# Altium PCB EV306V1.1.PcbDoc (part 1 of 2)
Units mil, origin at the board's own origin, x right, y up, seen from the top; angles counter-clockwise.
Board outline 2423.31 x 1575 mil, 2 copper layers (Top Layer, Bottom Layer); 70 components, 60 nets, 272 pads, 204 vias.
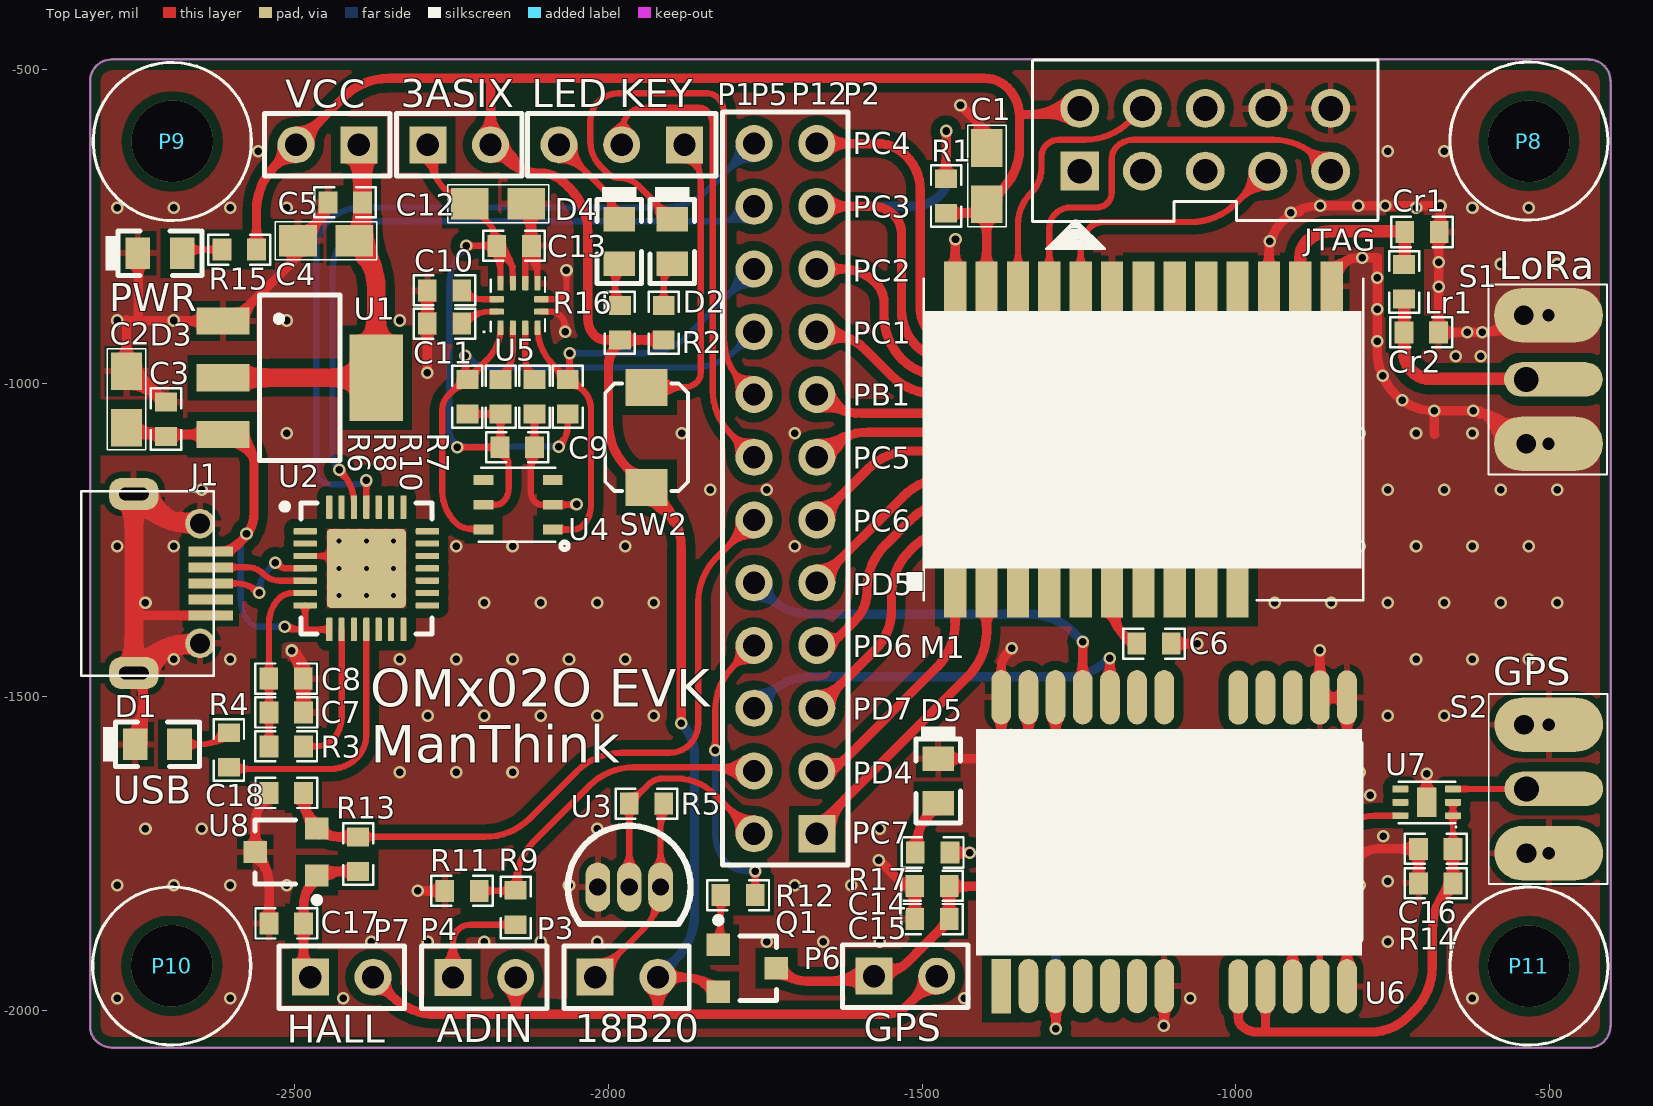
[diagram p0: Top Layer view]
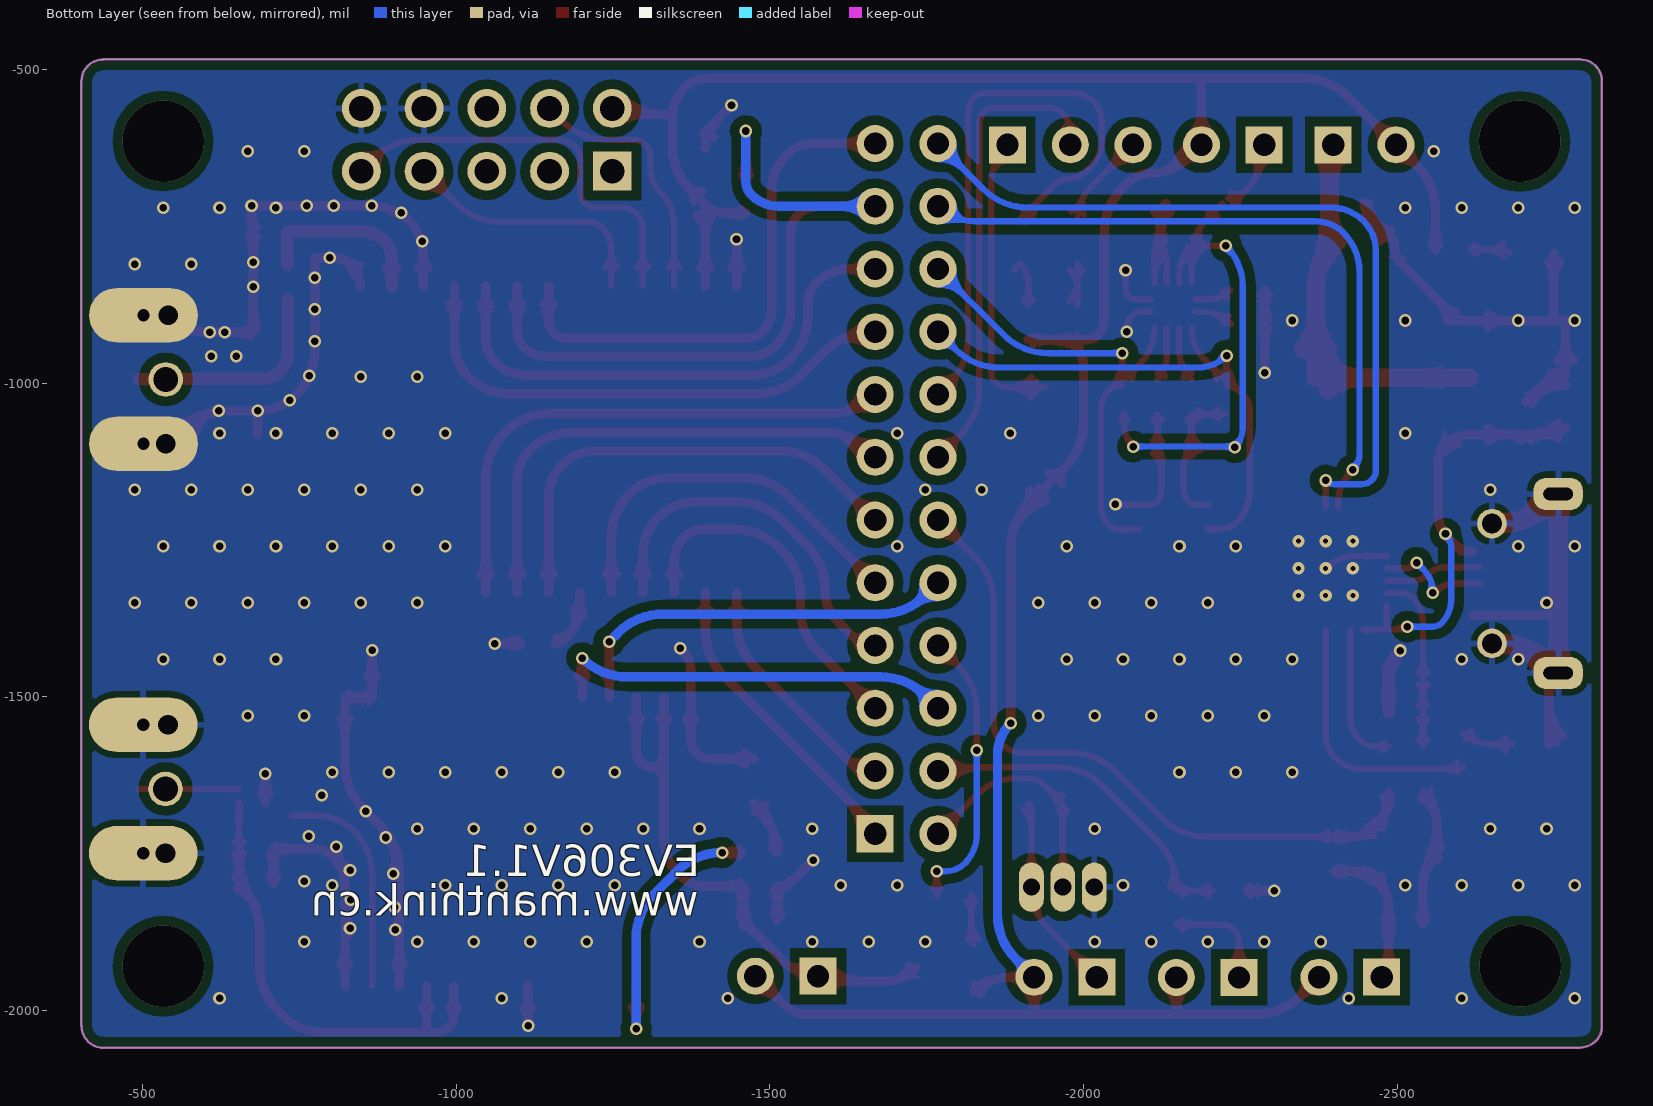
[diagram p1: Bottom Layer view, seen from below]

## Layer stack, top to bottom
Top Layer: signal copper 1.4
Dielectric: dielectric 12.6, FR-4, Dk 4.8
Bottom Layer: signal copper 1.4

## Board outline
-2826.31,-554 -2826.31,-518.46 cw(c-2792.13,-518.46) -2816.3,-494.3 -2815,-493 cw(c-2793.27,-514.73) -2793.27,-484 -2789.48,-484 -437.14,-484 cw(c-437.14,-518.14) -413,-494 cw(c-437.14,-518.14) -403,-518.14 -403,-535 -403,-2023.44 cw(c-440.56,-2023.44) -414,-2050 cw(c-435.73,-2028.27) -435.73,-2059 -440,-2059 -2789.03,-2059 cw(c-2789.03,-2018.03) -2818,-2047 cw(c-2797.94,-2026.94) -2826.31,-2026.94 -2826.31,-2022 -2826.31,-554

## Design rules (kind name [scope] priority, off if disabled: settings)
Clearance "Stitching GND" [IsStitchingVia and InNet('GND') vs (IsVia and (Not IsStitchingVia)) Or IsPad] p1: gap=15
Clearance [All] p2 off: gap=8
Clearance Clearance_1 [All] p3: gap=8
Clearance LNA_Net [All] p4 off: gap=15
ComponentClearance [All] p1 off: gap=10 collisioncheckmode=3 verticalgap=10 showdistances=FALSE
FabricationTestpoint [(IsPad And (OnTopLayer Or OnBottomLayer))] p1: side=3 testpointundercomponent=TRUE minsize=40 maxsize=100 preferedsize=60 minholesize=0 maxholesize=40 preferedholesize=32 testpointgrid=1 allowsidetop=TRUE allowsidebottom=TRUE usegrid=TRUE gridtolerance=0.01
HoleSize [All] p1: absolutevalues=TRUE maxlimit=393.7 minlimit=0 maxpercent=80.000 minpercent=20.000
HoleToHoleClearance [All] p1: gap=8 allowstackedmicrovias=TRUE
MinimumSolderMaskSliver MinimumSolderMaskSliver_TSSOP [(InComponent('U4') OR InComponent('U1') OR InComponent('U3')OR InComponent('U5')) vs (InComponent('U4') OR InComponent('U1') OR InComponent('U3')OR InComponent('U5'))] p1: minsoldermaskwidth=0
MinimumSolderMaskSliver MinimumSolderMaskSliver_OSC [InComponent('Xr1') vs InComponent('Xr1')] p2: minsoldermaskwidth=6
MinimumSolderMaskSliver MinimumSolderMaskSliver_QFN [InComponent('U2') vs InComponent('U2')] p3: minsoldermaskwidth=0
MinimumSolderMaskSliver [All] p4: minsoldermaskwidth=1
PlaneClearance PlaneClearance_RFRC [(InNet('GND') AND InComponentClass('RF'))] p1: clearance=13.78
PlaneClearance PlaneClearance_QFN [(InComponent('U2') AND InNet('GND'))] p2 off: clearance=13.78
PlaneClearance [All] p3: clearance=13.78
PlaneConnect PlaneConnect_RFRC [(InNet('GND') AND InComponentClass('RF') )] p1: planeconnectstyle=Direct reliefexpansion=20 reliefentries=4 reliefconductorwidth=10 reliefairgap=10
PlaneConnect PlaneConnect_RFQFN [(InNet('GND') AND InComponent('U2'))] p2 off: planeconnectstyle=Direct reliefexpansion=20 reliefentries=4 reliefconductorwidth=10 reliefairgap=10
PlaneConnect [All] p3: planeconnectstyle=Relief reliefexpansion=20 reliefentries=4 reliefconductorwidth=10 reliefairgap=15
PolygonConnect PolygonConnect_CON [(InComponent('P1') OR InComponent('P2') OR InComponent('P3') OR InComponent('P4') OR InComponent('P5')) vs InNet('GND')] p1: connectstyle=Relief reliefconductorwidth=30 reliefentries=4 polygonreliefangle="90 Angle" airgapwidth=10
PolygonConnect PolygonConnect_VIA [IsVia vs InNet('GND')] p2: connectstyle=Direct reliefconductorwidth=10 reliefentries=4 polygonreliefangle="90 Angle" airgapwidth=10
PolygonConnect PolygonConnect_RFRC [InNet('GND') vs InComponentClass('RF')] p3: connectstyle=Relief reliefconductorwidth=15 reliefentries=4 polygonreliefangle="90 Angle" airgapwidth=10
PolygonConnect PolygonConnect_RFIC [InNet('GND') vs ((InComponent('S1') OR InComponent('U2')))] p4: connectstyle=Direct reliefconductorwidth=10 reliefentries=4 polygonreliefangle="90 Angle" airgapwidth=10
PolygonConnect [All] p5: connectstyle=Relief reliefconductorwidth=10 reliefentries=4 polygonreliefangle="90 Angle" airgapwidth=10
RoutingCorners [All] p1: cornerstyle=Round minsetback=100 maxsetback=100
RoutingVias [All] p1: holewidth=12 width=20 viastyle="Through Hole" minholewidth=0 minwidth=0 maxholewidth=40 maxwidth=60
SilkToSilkClearance [All] p1 off: silktosilkclearance=8
SilkToSolderMaskClearance [IsPad] p1 off: minsilkscreentomaskgap=8 clearancetoexposedcopper=TRUE
SolderMaskExpansion [All] p1: expansion=4
Width [All] p1: maxlimit=40 minlimit=3.94 preferedwidth=10
18 further rules are at their usual default settings.

## Classes and differential pairs
component class Module&Connector: C1 C2 C3 C4 C5 C6 C7 C8 Cr1 Cr2 D1 D2 D3 D4 J1 JTAG Lr1 M1 P1 P2 P8 P9 P10 P11 P12 R1 R2 R3 R4 R15 R16 S1 SW2 U1 U2
component class Sensor: C9 C10 C11 C12 C13 C14 C15 C16 C17 C18 D5 P3 P4 P5 P6 P7 Q1 R5 R6 R7 R8 R9 R10 R11 R12 R13 R14 R17 S2 U3 U4 U5 U6 U7 U8

## Components (designator, comment, footprint, x,y, rotation, side; value= is the part's Value field where it differs from the comment)
C1 "10uF" 0805 -1397,-715 r0 top
C2 "10uF" 0805 -2768.31,-1070.69 r0 top
C3 "0.1uF" 0603RF -2705.31,-1083.69 r90 top
C4 "10uF" 0805 -2405,-773 r90 top
C5 "0.1uF" 0603RF -2393.31,-711.69 r180 top
C6 "0.1uF" 0603RF -1104,-1415 r180 top
C7 "4.7uF" 0603RF -2540.31,-1524.69 r0 top
C8 "0.1uF" 0603RF -2540.43,-1470.69 r0 top
C9 "100pF" 0603RF -2119,-1102 r180 top
C10 "0.1uF" 0603RF -2235,-852 r180 top
C11 "0.1uF" 0603RF -2288,-905 r0 top
C12 "10uF" 0805 -2221,-714 r270 top
C13 "0.1uF" 0603RF -2124,-781 r180 top
C14 "0.1uF" 0603RF -1511,-1801 r0 top
C15 "2.2uF" 0603RF -1458,-1854 r180 top
C16 "100pF" 0603RF -708,-1742 r0 top
C17 "10nF" 0603RF -2540,-1861 r0 top
C18 "100pF" 0603RF -2540,-1653 r0 top
Cr1 "NC" 0603RF -677,-759 r180 top
Cr2 "NC" 0603RF -678,-919 r180 top
D1 "RED" LED0603 -2680,-1580 r0 top
D2 "Blue" LED0603 -1903,-813 r270 top
D3 "RED" LED0603 -2676,-797 r0 top
D4 "RED" LED0603 -1987,-813 r270 top
D5 "Blue" LED0603 -1479,-1673 r270 top
J1 "micro usb" MICROUSB-D -2634,-1268 r180 top
JTAG "IDC-10" JTAG10-MINI -1049,-662 r0 top
Lr1 "0" 0603RF -732,-812 r270 top
M1 "OMx02" OMx02 -1448,-1343 r0 top
P1 "Header 2" HDR1X2 -2398,-620 r180 top
P2 "Header 12X2" Header2X12 -1676,-920 r0 top
P3 "Header 2" HDR1X2 -2021.31,-1946.69 r0 top
P4 "Header 2" HDR1X2 -2248,-1947 r0 top
P5 "Header 2" HDR1X2 -2288,-620 r0 top
P6 "Header 2" HDR1X2 -1577,-1945 r0 top
P7 "Header 2" HDR1X2 -2475.31,-1946.69 r0 top
P8 "Header1" FIX_HOLE -533,-614 r0 top locked
P9 "Header1" FIX_HOLE -2695.31,-614.69 r0 top locked
P10 "Header1" FIX_HOLE -2696.31,-1928.69 r0 top locked
P11 "Header1" FIX_HOLE -533,-1929 r0 top locked
P12 "Header 3" HDR1X3 -1879,-620 r180 top
Q1 "8550" SO-G3/Z3.3 -1779,-1933 r270 top
R1 "47KR" 0603RF -1462,-675 r270 top
R2 "1kR" 0603RF -1912,-877 r270 top
R3 "4.7K" 0603RF -2487.31,-1578.69 r180 top
R4 "4.7K" 0603RF -2605,-1611 r90 top
R5 "510R" 0603RF -1913,-1670 r180 top
R6 "47KR" 0603RF -2225,-995 r270 top
R7 "47KR" 0603RF -2065,-995 r270 top
R8 "47KR" 0603RF -2172,-995 r270 top
R9 "10kR" 0603RF -2148,-1862 r90 top
R10 "0R" 0603RF -2118,-995 r270 top
R11 "10kR" 0603RF -2207,-1809 r180 top
R12 "1kR" 0603RF -1820,-1816 r0 top
R13 "100KR" 0603RF -2399,-1777 r90 top
R14 "4.7K" 0603RF -655,-1797 r180 top
R15 "1kR" 0603RF -2615,-787 r0 top
R16 "1kR" 0603RF -1982,-877 r270 top
R17 "1kR" 0603RF -1510,-1748 r0 top
S1 "SMA" SMA -530.42,-990.38 r0 top
S2 "SMA" SMA -530,-1643 r0 top
SW2 "SW2_STM151XX" SW24*3 -1938,-1009 r270 top
U1 "LM1117-3.3" SOT-223 -2614.31,-900.69 r180 top
U2 "CP2102" QFN28_CP2102 -2386,-1295 r0 top
U3 "DS18B20" LC-TO-92(TO-92-3) -2017,-1803 r0 top
U4 "SHT20" QFN6 -2085,-1231 r180 top
U5 "LIS2DH12" LIS2DH12 -2145,-876 r90 top
U6 "NEO_6M" NEO-5 -823,-1491 r270 top
U7 "SKY65715_81" SKY65715 -699.39,-1668.51 r180 top
U8 "YS4915" SOT-23 -2514,-1747 r90 top

## Footprints (in the part's own frame and the unit in brackets; to place one, negate y for a bottom-side part, rotate by r counter-clockwise, add the part's x,y. Pads: shape width x height; smd on the part's side, far side on the other; paste and mask are expansions set on the pad)
0603RF [mil]
  rect 30x35 smd: 1(-1,0) 2(54,0)
  silkscreen extent -23,-24 76,24
0805 [mil]
  rect 50x60 smd: 1(0,0) 2(0,90)
  silkscreen extent -31,-35 31,126
FIX_HOLE [mil]
  silkscreen extent -126,-126 126,126
HDR1X2 [mm] "Connector; Header; 2 Position"
  rect 1.5x1.5 hole 0.9: 1(0,0)
  round 1.5 hole 0.9: 2(2.54,0)
  silkscreen extent -1.27,-1.27 3.81,1.27
HDR1X3 [mm] "Connector; Header; 3 Position"
  rect 1.5x1.5 hole 0.9: 1(0,0)
  round 1.5 hole 0.9: 2(2.54,0) 3(5.08,0)
  silkscreen extent -1.27,-1.27 6.35,1.27
Header2X12 [mm]
  rect 1.5x1.5 hole 0.9: 1(0.203,-20.269)
  round 1.5 hole 0.9: 2(-2.337,-20.269) 3(0.203,-17.729) 4(-2.337,-17.729) 5(0.203,-15.189) 6(-2.337,-15.189) 7(0.203,-12.649) 8(-2.337,-12.649) 9(0.203,-10.109) 10(-2.337,-10.109) 11(0.203,-7.569) 12(-2.337,-7.569) 13(0.203,-5.029) 14(-2.337,-5.029) 15(0.203,-2.489) 16(-2.337,-2.489) 17(0.203,0.051) 18(-2.337,0.051) 19(0.203,2.591) 20(-2.337,2.591) 21(0.203,5.131) 22(-2.337,5.131) 23(0.203,7.671) 24(-2.337,7.671)
  silkscreen extent -3.61,-21.54 1.47,8.94
JTAG10-MINI [mil]
  rect 62x62 hole 39.37: 1(-200,0)
  round 62 hole 39.37: 2(-200,100) 3(-100,0) 4(-100,100) 5(0,0) 6(0,100) 7(100,0) 8(100,100) 9(200,0) 10(200,100)
  silkscreen extent -276,-124 276,177
LC-TO-92(TO-92-3) [mm]
  oval 1x2 hole 0.7 mask+0.051: 1(0,0) 2(1.27,0) 3(2.54,0)
  silkscreen extent -1.21,-1.5 3.75,2.48, body extent -1.34,-1.6 3.88,2.6, height 8
LED0603 [mm]
  rect 1x1.27 smd: 1(-0.092,0.111) 2(-1.892,0.111)
  silkscreen extent -3.19,-0.79 0.71,1.01
LIS2DH12 [mm]
  rrect10% 0.575x0.25 smd: 1(-0.9,0.689) 10(0.9,0.689)
  rrect25% 0.575x0.25 smd: 2(-0.9,0.189) 3(-0.9,-0.311) 4(-0.9,-0.811) 7(0.9,-0.811) 8(0.9,-0.311) 9(0.9,0.189)
  rrect25% 0.25x0.575 smd: 5(-0.25,-0.961) 6(0.25,-0.961) 11(0.25,0.839) 12(-0.25,0.839)
  silkscreen extent -1.05,-1.11 1.15,1.09
MICROUSB-D [mm]
  rect 1.8x0.4 smd: 1(0,0) 2(0,0.65) 3(0,1.3) 4(0,1.95) 5(0,2.6)
  round 1.2 hole 0.8: 6(0.432,-1.125) 7(0.432,3.725)
  rrect77% 2x1.3 hole 0.5 slot 1.2 at 0 deg: 8(3.112,-2.325) 9(3.112,4.925)
  silkscreen extent -0.12,-2.43 5.23,5.03
NEO-5 [mil]
  rect 86.61x31.5 smd: 1(469.9,-551.1)
  oval 86.61x31.5 smd: 2(469.9,-507.8) 3(469.9,-464.5) 4(469.9,-421.2) 5(469.9,-377.9) 6(469.9,-334.6) 7(469.9,-291.3) 8(470.3,-173.2) 9(470.3,-129.9) 10(470.3,-86.6) 11(470.3,-43.3) 12(470,0) 13(10,0) 14(10,-43.3) 15(10,-86.6) 16(10,-129.9) 17(10,-173.2) 18(9.6,-291.3) 19(9.6,-334.6) 20(9.6,-377.9) 21(9.6,-421.2) 22(9.6,-464.5) 23(9.6,-507.8) 24(9.6,-551.1)
  silkscreen extent 84,-586 395,22
OMx02 [mm]
  rect 0.9x2 smd: 1(0.014,0.234) 2(1.284,0.234) 3(2.554,0.234) 4(3.824,0.234) 5(5.094,0.234) 6(6.364,0.234) 7(7.634,0.234) 8(8.904,0.234) 9(10.174,0.234) 10(11.444,0.234) 11(15.254,12.634) 12(13.984,12.634) 13(12.714,12.634) 14(11.444,12.634) 15(10.174,12.634) 16(8.904,12.634) 17(7.634,12.634) 18(6.364,12.634) 19(5.094,12.634) 20(3.824,12.634) 21(2.554,12.634) 22(1.284,12.634) 23(0.014,12.634)
  silkscreen extent -1.26,-0.07 16.52,12.93
QFN6 [mm]
  rect 0.8x0.4 smd: 1(0.102,0.051) 2(0.102,-0.949) 3(0.102,-1.949) 4(2.902,-1.949) 5(2.902,-0.949) 6(2.902,0.051)
  silkscreen extent -0.53,-2.45 3.1,0.86
QFN28_CP2102 [mm] "QFN, 28-Leads, Body 5.00x5.00mm, Pitch 0.50mm, Thermal Pad 3.13x3.13mm, IPC Low Density"
  rrect10% 3.2x3.2 smd: 0(0,0)
  rrect25% 0.95x0.25 smd: 1(-2.475,1.5) 2(-2.475,1) 3(-2.475,0.5) 4(-2.475,0) 5(-2.475,-0.5) 6(-2.475,-1) 7(-2.475,-1.5) 15(2.475,-1.5) 16(2.475,-1) 17(2.475,-0.5) 18(2.475,0) 19(2.475,0.5) 20(2.475,1) 21(2.475,1.5)
  rrect25% 0.25x0.95 smd: 8(-1.5,-2.475) 9(-1,-2.475) 10(-0.5,-2.475) 11(0,-2.475) 12(0.5,-2.475) 13(1,-2.475) 14(1.5,-2.475) 22(1.5,2.475) 23(1,2.475) 24(0.5,2.475) 25(0,2.475) 26(-0.5,2.475) 27(-1,2.475) 28(-1.5,2.475)
  silkscreen extent -3.42,-2.65 2.65,2.65, body extent -2.5,-2.5 2.5,2.5, height 0.8
SKY65715 [mm]
  rrect10% 0.8x1.2 smd: 0(-0.086,-0.013)
  rrect10% 0.65x0.275 smd: 1(-1.151,0.527)
  rrect25% 0.65x0.275 smd: 2(-1.151,-0.013) 3(-1.151,-0.553) 4(0.979,-0.553) 5(0.979,-0.013) 6(0.979,0.527)
  silkscreen extent -1.25,-0.84 1.05,0.83
SMA [mm]
  round 1.4 hole 1: 1(-0.175,-0.092)
  oval 4x1.397 smd: 1(0.925,-0.092)
  round 1.4 hole 0.8: 2(-0.275,2.508) 2(-0.175,-2.692)
  oval 4.4x2.2 hole 0.5: 2(0.725,-2.692) 2(0.725,2.508)
  silkscreen extent -1.7,-3.94 3.1,3.76
SO-G3/Z3.3 [mm]
  rect 0.9x0.95 smd: 1(-0.962,-1.167) 2(0.937,-1.167) 3(-0.012,1.183)
  silkscreen extent -2.09,-1.29 1.29,1.18
SOT-23 [mm] "SOT-23; 3 Leads; Body 3.0 x 2.6 mm, inc. leads (LxW max)"
  rect 0.9x0.95 smd: 1(-0.95,-1.25) 2(0.95,-1.25) 3(0,1.25)
  silkscreen extent -2.07,-1.38 1.3,1.25
SOT-223 [mm]
  rect 2.15x1.1 smd: 1(0,0) 2(0,2.3) 3(0,4.6)
  rect 2.15x3.5 smd: 4(-6.2,2.3)
  silkscreen extent -4.72,-1.05 -1.47,5.65
SW24*3 [mm]
  rect 1.5x1.7 smd: 1(-0.064,-0.03) 2(3.986,-0.03)
  silkscreen extent -0.22,-1.71 4.14,1.65

## Part data
C1 C2 C4 C12: library part "CAPACITOR POL", "Capacitor"
C3 C5: library part Cap, "Capacitor"
C6 C7 C8 C10 C11 C13 C14 C15 Cr1 Cr2: library part "Cap Semi", "Capacitor (Semiconductor SIM Model)"
C9 C17 C18: library part CAP, "Capacitor"
C16: library part 100pF/50V,10%,C0603, "Capacitor,100pF/50V,10%,C0603"
D1 D2 D3 D4 D5: library part LED2, "Typical RED, GREEN, YELLOW, AMBER GaAs LED"
J1: "同GDI401的USB接口一致"
JTAG: library part "Header 5X2", "双排插针2.54mm"
Lr1: library part Inductor, "Inductor"
P1 P3 P4 P5 P6 P7: "Header, 2-Pin"
P2: "Header, 12-Pin, Dual row"
P12: "Header, 3-Pin"
Q1: "PNP三极管"
R1 R2 R3 R4 R6 R7 R8 R9 R10 R11 R15 R16 R17: library part "Res Semi", "Semiconductor Resistor"
R5 R12: library part R
R13: library part Res2, "Resistor"
R14: library part 0R,5%,R1206
S1 S2: library part SMB, "SMB Straight Connector"
SW2: "轻触开关3x4x2,http://www.szlcsc.com/product/details_27383.html"
U1: library part LM1117, "LM1117 5V转3.3V电源芯片"
U2: "USBתUARTоƬ"
U6: library part NEO_0, "GPS模块"
U7: library part SKY65715
U8: library part ES248L

## Via types
v1: diameter 20, hole 12, Top Layer to Bottom Layer, tented both sides, 191 vias
v2: diameter 19.68, hole 7.87, Top Layer to Bottom Layer, tented both sides, 9 vias
v3: diameter 129.92, hole 129.92, Top Layer to Bottom Layer, tented both sides, 4 vias

## Nets (pads, with @x,y where several pads share a name; then routed paths per layer and width w, separated by ;. In a path a pad name is that pad's centre, name@x,y a point inside that pad or via, vN(x,y) a via of type N, cw(c..) or ccw(c..) an arc to the next point about the centre after c; other vN are vias at no path point)
AD_IN1: M1.1 P2.3 | length 523
  Top Layer w15: P2.3@-1668,-1618 ccw(c-1668,-1555.23) -1623.62,-1599.62 -1476.75,-1452.75 ccw(c-1547.46,-1382.04) -1447.46,-1382.04 M1.1@-1447.46,-1333.78 ; -1636.62,-1609.59 cw(c-1639.97,-1597.08) -1650.35,-1604.83 ccw(c-1639.97,-1597.08) -1636.62,-1609.59 ; -1636.62,-1609.59 ccw(c-1633.26,-1622.1) -1646.12,-1620.58 cw(c-1633.26,-1622.1) -1636.62,-1609.59 ; -1447.46,-1380.1 cw(c-1422.8,-1380.1) -1440.24,-1362.66 ccw(c-1422.8,-1380.1) -1447.46,-1380.1 ; -1447.46,-1380.1 ccw(c-1472.13,-1380.1) -1454.69,-1362.66 cw(c-1472.13,-1380.1) -1447.46,-1380.1
AD_IN2: P2.4 R9.2 R11.1 | length 867.4
  Top Layer w10: R11.1@-2206,-1809 -2150.41,-1809 ccw(c-2150.41,-1805.59) R9.2@-2148,-1808 -2148,-1800.42 cw(c-2048,-1800.42) -2118.71,-1729.71 -2030.29,-1641.29 cw(c-1959.58,-1712) -1959.58,-1612 -1782.49,-1612 cw(c-1782.49,-1632.49) P2.4@-1768,-1618 ; R9.2@-2151.12,-1799.73 ccw(c-2157.26,-1790.7) -2146.54,-1792.75 ; -2143.04,-1774.37 ccw(c-2106.33,-1781.36) R9.2@-2137.23,-1802.38 ; -1841.7,-1612 cw(c-1841.7,-1691.7) P2.4@-1785.34,-1635.34 ; -1817.56,-1612 cw(c-1817.56,-1667.56) P2.4@-1778.27,-1628.27 ; -1812.73,-1612 ccw(c-1812.73,-1573.27) P2.4@-1785.34,-1600.66 ; -2181.86,-1809 cw(c-2181.86,-1784.86) -2198.93,-1801.93 ccw(c-2181.86,-1784.86) -2181.86,-1809 ; -2181.86,-1809 ccw(c-2181.86,-1833.14) -2198.93,-1816.07 cw(c-2181.86,-1833.14) -2181.86,-1809 ; -2177.06,-1809 ccw(c-2177.06,-1781.44) -2157.57,-1800.93 cw(c-2177.06,-1781.44) -2177.06,-1809 ; -2172.23,-1809 cw(c-2172.23,-1829.73) -2157.57,-1815.07 ccw(c-2172.23,-1829.73) -2172.23,-1809
AUX1: M1.9 P2.15 | length 1030.3
  Top Layer w15: P2.15@-1668,-1018 -1667.29,-1018.71 ccw(c-1596.58,-948) -1596.58,-1048 -1149.42,-1048 cw(c-1149.42,-1148) -1078.71,-1077.29 -1076.75,-1079.25 cw(c-1147.46,-1149.96) -1047.46,-1149.96 M1.9@-1047.46,-1333.78 ; P2.15@-1662.3,-1039.28 cw(c-1648.76,-1089.79) -1622.62,-1044.5 ; P2.15@-1646.65,-1012.56 ccw(c-1596.41,-999.76) -1622.33,-1044.67 ; -1047.46,-1287.46 cw(c-1072.13,-1287.46) -1054.69,-1304.9 ccw(c-1072.13,-1287.46) -1047.46,-1287.46 ; -1047.46,-1287.46 ccw(c-1022.8,-1287.46) -1040.24,-1304.9 cw(c-1022.8,-1287.46) -1047.46,-1287.46
AUX2: D2.2 P2.16 | length 1117.5
  Top Layer w10: D2.2@-1921.89,-726.35 ccw(c-1897.84,-719.9) D2.2@-1905.6,-743.56 ; D2.2@-1898.63,-738.51 -1951.51,-685.63 ccw(c-1982,-716.11) -1982,-673 cw(c-1982,-644.03) -2002.49,-664.51 -2012.03,-654.97 cw(c-1971.06,-614) -2029,-614 -2029,-582.38 cw(c-1984.62,-582.38) -2016,-551 cw(c-1984.62,-582.38) -1984.62,-538 -1842.3,-538 cw(c-1842.3,-560.49) -1826.4,-544.59 cw(c-1851.5,-569.69) -1816,-569.69 -1816,-928.58 ccw(c-1716,-928.58) -1786.71,-999.29 P2.16@-1768,-1018 ; -1932.77,-704.37 cw(c-1966.91,-738.51) -1918.63,-738.51 ccw(c-1966.91,-738.51) -1932.77,-704.37 ; -1919.94,-717.2 ccw(c-1903.94,-701.21) -1903.94,-723.83 cw(c-1903.94,-701.21) -1919.94,-717.2 ; D2.2@-1915.7,-721.44 cw(c-1932.77,-738.51) -1908.63,-738.51 ccw(c-1932.77,-738.51) D2.2@-1915.7,-721.44
D+: J1.3 U2.4 | length 276.1
  Top Layer w10: J1.3@-2634,-1319.18 -2592.78,-1319.18 cw(c-2592.78,-1369.78) v1(-2557,-1334) ; v1@-2561.83,-1335.29 ccw(c-2573.49,-1338.42) -2567.45,-1327.96 ccw(c-2561.42,-1317.51) v1@-2558.29,-1329.17 ; v1(-2531,-1286) -2528,-1289 ccw(c-2513.51,-1274.51) -2513.51,-1295 U2.4@-2483.44,-1295 ; v1@-2526.17,-1284.71 ccw(c-2510.89,-1280.61) -2518.8,-1294.31
  Bottom Layer w10: v1@-2559.5,-1329.67 ccw(c-2565.54,-1319.22) -2553.88,-1322.34 ccw(c-2542.22,-1325.46) v1@-2552.67,-1331.5 ; v1(-2557,-1334) cw(c-2503.89,-1334) -2541.45,-1296.45 v1(-2531,-1286) ; -2539.54,-1294.54 cw(c-2531,-1303.07) -2531,-1291 ccw(c-2531,-1303.07) -2539.54,-1294.54 ; -2539.54,-1294.54 ccw(c-2548.07,-1286) -2536,-1286 cw(c-2548.07,-1286) -2539.54,-1294.54
D-: J1.2 U2.5 | length 153.3
  Top Layer w10: J1.2@-2631,-1293.28 -2575.87,-1293.28 cw(c-2575.87,-1329.87) -2550,-1304 ccw(c-2524.2,-1278.2) -2524.2,-1314.69 U2.5@-2483.44,-1314.69
GND: C1.2 C2.2 C3.2 C4.2 C5.2 C6.1 C7.2 C8.2 C9.1 C10.2 C11.1 C12.2 C13.1 C14.1 C15.2 C16.1 C17.1 C18.1 Cr1.1 Cr2.1 D1.2 D3.2 D5.2 J1.5 J1.6 J1.7 J1.8 J1.9 JTAG.8 JTAG.10 M1.11 M1.13 M1.18 M1.23 R10.2 R11.2 R14.2 S1.2 S2.2 U1.1 U2.0 U2.3 U3.1 U4.2 U5.5 U5.6 U5.7 U5.8 U6.7 U6.10 U6.12 U6.13 U6.14 U6.24 U7.0 U8.3 | length 12383
  Top Layer w10: U2.3@-2483.44,-1275.32 -2433.52,-1275.32 cw(c-2433.52,-1342.52) v2(-2386,-1295) ; U5.8@-2132.76,-840.58 -2132.76,-804.56 cw(c-2099.44,-804.56) C13.1@-2123,-781 ; -2124.72,-799.84 cw(c-2112.62,-792.85) C13.1@-2123,-783.5 ; -2124,-1143.13 cw(c-2079.37,-1143.13) C9.1@-2110.93,-1111.57 ; C9.1@-2124,-1118.99 cw(c-2103.51,-1118.99) C9.1@-2118,-1104.5 ; C13.1@-2123.11,-793.5 cw(c-2123.23,-803.89) -2114.23,-798.69 cw(c-2105.23,-793.5) C13.1@-2114.28,-788.4 ; R10.2@-2118,-1049 C9.1@-2118,-1102 ccw(c-2103.51,-1116.49) -2124,-1116.49 -2124,-1172.1 ccw(c-2100.1,-1172.1) -2117,-1189 ccw(c-2105.82,-1177.82) -2105.82,-1193.63 U4.2@-2089,-1193.63 -2052.52,-1193.63 ccw(c-2052.52,-1191.48) v1(-2051,-1193) ; -2117.84,-811.76 cw(c-2101.87,-802.54) C13.1@-2115.57,-790.19 ; C13.1@-2117,-781 cw(c-2126.48,-790.48) -2113.07,-790.48 U5.7@-2113.07,-840.58 ; U5.5@-2107.17,-885.86 -2093.24,-885.86 cw(c-2093.24,-910.24) -2076,-893 cw(c-2092.9,-909.9) -2069,-909.9 v1(-2069,-918) ; U5.6@-2107.17,-866.17 -2085.9,-866.17 ccw(c-2085.9,-845.1) -2071,-860 ccw(c-2080.66,-850.34) -2067,-850.34 v1(-2067,-820) ; U2.0@-2396.12,-1289.15 cw(c-2401.97,-1299.28) -2390.68,-1296.25 ccw(c-2401.97,-1299.28) U2.0@-2396.12,-1289.15 ; U2.0@-2396.12,-1289.15 ccw(c-2390.28,-1279.03) -2387.25,-1290.32 cw(c-2390.28,-1279.03) U2.0@-2396.12,-1289.15 ; C13.1@-2123,-783.5 cw(c-2146.97,-807.47) -2113.07,-807.47 ccw(c-2146.97,-807.47) C13.1@-2123,-783.5 ; -2118,-1075.36 cw(c-2142.14,-1075.36) -2125.07,-1092.43 ccw(c-2142.14,-1075.36) -2118,-1075.36 ; -2118,-1075.36 ccw(c-2093.86,-1075.36) -2110.93,-1092.43 cw(c-2093.86,-1075.36) -2118,-1075.36 ; -2118,-1073.14 cw(c-2093.86,-1073.14) -2110.93,-1056.07 ccw(c-2093.86,-1073.14) -2118,-1073.14 ; -2118,-1073.14 ccw(c-2142.14,-1073.14) -2125.07,-1056.07 cw(c-2142.14,-1073.14) -2118,-1073.14 ; -2067,-832.07 cw(c-2054.93,-832.07) -2063.46,-823.54 ccw(c-2054.93,-832.07) -2067,-832.07 ; -2067,-832.07 ccw(c-2079.07,-832.07) -2070.54,-823.54 cw(c-2079.07,-832.07) -2067,-832.07 ; C13.1@-2130.07,-790.57 cw(c-2171.11,-831.61) -2113.07,-831.61 ccw(c-2171.11,-831.61) C13.1@-2130.07,-790.57 ; v1@-2073.27,-915.4 ccw(c-2088.53,-906.09) -2071.26,-901.46 cw(c-2088.53,-906.09) v1@-2073.27,-915.4 ; -2064.59,-1193.63 ccw(c-2064.59,-1179.41) -2054.54,-1189.46 cw(c-2064.59,-1179.41) -2064.59,-1193.63 ; -2061.55,-1193.63 cw(c-2061.55,-1203.55) -2054.54,-1196.54 ccw(c-2061.55,-1203.55) -2061.55,-1193.63
  Top Layer w15: C2.2@-2768.31,-980.69 -2768.31,-899 ccw(c-2764.22,-894.91) -2764.22,-900.69 U1.1@-2614.31,-900.69 ccw(c-2614.31,-860.58) -2585.94,-888.94 -2510.45,-813.45 ccw(c-2547.02,-776.89) -2495.31,-776.89 -2495.31,-773.69 -2457.21,-735.59 ; C2.2@-2766.1,-984.51 ccw(c-2714.17,-956.72) -2729.42,-1013.61 ; C2.2@-2759.32,-981.91 cw(c-2768.31,-1014.49) -2744.41,-990.59 C3.2@-2705.31,-1029.69 ; C2.2@-2758.05,-999.87 cw(c-2744.36,-1018.78) -2738.32,-996.23 cw(c-2733.74,-979.15) C2.2@-2751.11,-982.44 ; J1.9@-2756.54,-1461.9 cw(c-2792.12,-1497.48) -2741.8,-1497.48 D1.2@-2741.8,-1575.32 ; D3.2@-2750.49,-792.63 cw(c-2753.34,-795.48) -2749.31,-795.48 -2749.31,-899 ; -2747.67,-1534.97 ccw(c-2726.93,-1546.94) D1.2@-2745.2,-1562.43 ; -2740.3,-1370.06 J1.5@-2620.31,-1370.06 ; -2725.88,-1017.52 cw(c-2737.5,-1037.65) C3.2@-2715.05,-1031.63 ; J1.6@-2651.02,-1223.4 J1.6@-2637.33,-1223.4 ; U1.1@-2593.39,-901.5 ccw(c-2601.55,-874.67) U1.1@-2574.46,-881.93 ; C18.1@-2542,-1653 ccw(c-2490.79,-1704.21) -2563.21,-1704.21 U8.3@-2563.21,-1747 cw(c-2616.84,-1800.63) -2541,-1800.63 C17.1@-2541,-1861 ; C4.2@-2490.74,-770.61 ccw(c-2502.12,-733.83) -2464.86,-743.53 ; C5.2@-2447.31,-711.69 cw(c-2481.11,-711.69) -2457.21,-735.59 ; v1(-2304,-1809) R11.2@-2261,-1809 ; v1(-2289,-983) C11.1@-2289,-905 C10.2@-2289,-852 ; C12.2@-2131,-714 cw(c-2150.31,-733.31) -2123,-733.31 C13.1@-2123,-781 ; v1(-1569,-1760) -1537.61,-1791.39 ccw(c-1512,-1765.79) -1512,-1802 C15.2@-1512,-1856 ; D5.2@-1474.63,-1598.51 -1404.55,-1598.51 ccw(c-1404.55,-1569.45) -1384,-1590 ccw(c-1407.9,-1566.1) -1374.1,-1566.1 U6.24@-1374.1,-1500.6 -1374.1,-1454.8 ; M1.23@-1447.46,-845.59 -1447.46,-774.29 ccw(c-1449.29,-774.29) -1448,-773 ccw(c-1450.41,-770.59) v1(-1447,-770.59) ; v1(-1439,-557) -1415.38,-580.62 cw(c-1459.77,-625) C1.2@-1397,-625 ; U6.24@-1379.93,-1533.99 cw(c-1394.02,-1548.07) -1374.1,-1548.07 cw(c-1354.18,-1548.07) U6.24@-1368.27,-1533.99 ; v1(-1357.41,-1422.41) -1363,-1428 ccw(c-1336.2,-1454.8) -1374.1,-1454.8 ; U6.7@-1120.13,-1994.29 cw(c-1134.22,-2008.37) -1114.3,-2008.37 cw(c-1094.38,-2008.37) U6.7@-1108.47,-1994.29 ; v1(-1115,-2024) ccw(c-1116.69,-2022.31) -1114.3,-2022.31 U6.7@-1114.3,-1960.9 ; C6.1@-1103,-1415 v1(-1062,-1415) ; M1.13@-947.46,-845.59 -947.46,-793.82 cw(c-874.18,-793.82) -926,-742 cw(c-865.64,-802.36) v1(-865.64,-717) v1(-674,-717) -674,-754.17 ccw(c-666.76,-761.41) -677,-761.41 Cr2.1@-677,-919 v1(-607.3,-919) ccw(c-607.3,-825.58) S1.2@-541.24,-891.64 S1.2@-501.87,-891.64 ; U6.10@-915.43,-1927.91 ccw(c-929.52,-1913.83) -909.6,-1913.83 ccw(c-889.68,-1913.83) U6.10@-903.77,-1927.91 ; U6.10@-909.6,-1961.3 -909.6,-1777.02 cw(c-809.6,-1777.02) -880.31,-1706.31 -852.29,-1678.29 ccw(c-923,-1607.58) -823,-1607.58 U6.13@-823,-1501 U6.14@-866.3,-1501 v1(-866.3,-1425.3) ; -906.84,-1882.48 ccw(c-919.21,-1875.34) v1@-905.41,-1871.65 ; -906.84,-1859.52 cw(c-919.21,-1866.66) v1@-905.41,-1870.35 ; -905.84,-1846.48 ccw(c-918.21,-1839.34) v1@-904.41,-1835.65 ; -905.84,-1823.52 cw(c-918.21,-1830.66) v1@-904.41,-1834.35 ; -903.84,-1793.48 ccw(c-916.21,-1786.34) v1@-902.41,-1782.65 ; v1@-902.18,-1780.77 ccw(c-914.61,-1773.74) -900.85,-1769.92 ; -895.13,-1733.79 ccw(c-904.76,-1723.25) v1@-890.5,-1723.89 ; v1@-889.55,-1722.04 ccw(c-898.43,-1710.86) -884.25,-1712.49 ; U6.14@-872.13,-1467.61 ccw(c-886.22,-1453.53) -866.3,-1453.53 ccw(c-846.38,-1453.53) U6.14@-860.47,-1467.61 ; M1.11@-847.46,-845.59 cw(c-798.88,-845.59) -833.23,-811.23 cw(c-806.11,-838.35) -806.11,-800 -775,-800 -775,-947.58 ccw(c-675,-947.58) -745.71,-1018.29 ccw(c-683.64,-956.22) v1(-683.64,-1044) ; M1.11@-845.45,-813.92 ccw(c-841.65,-794.99) -824.93,-804.64 ; v1@-829.59,-1823.65 ccw(c-815.79,-1827.34) -828.16,-1834.48 ; v1@-829.5,-1822.91 cw(c-815.33,-1822.4) -825.69,-1812.71 ; U6.12@-828.83,-1927.61 ccw(c-842.92,-1913.53) -823,-1913.53 ccw(c-803.08,-1913.53) U6.12@-817.17,-1927.61 ; v1@-828.59,-1869.65 ccw(c-814.79,-1873.34) -827.16,-1880.48 ; v1@-828.59,-1868.35 cw(c-814.79,-1864.66) -827.16,-1857.52 ; v1@-828.58,-1776.62 cw(c-814.75,-1780.18) -822.01,-1767.89 ; U6.12@-823,-1961 -823,-1802.28 ; -811.44,-1750.86 cw(c-797.16,-1750.89) v1@-807.24,-1740.77 ; R14.2@-709,-1797 C16.1@-709,-1742 -774.03,-1742 ccw(c-774.03,-1782.97) -803,-1754 ccw(c-754.72,-1802.28) -823,-1802.28 ; U7.0@-696,-1668 v1(-696,-1622.41) ; -683,-1081 -683.64,-1080.36 v1(-683.64,-1044) ; -587.99,-1070.45 ccw(c-541.99,-1058.05) S1.2@-545.94,-1105.52 ; S1.2@-571.48,-1075.7 ccw(c-543.62,-1059.73) S1.2@-538.17,-1091.38 ; S1.2@-570.84,-904.2 cw(c-552.96,-914.5) S1.2@-543.55,-896.14 ; S1.2@-564.04,-910.99 ccw(c-564,-868.84) S1.2@-534.22,-898.67 ; S1.2@-535.83,-862.26 S1.2@-496.46,-862.26 ; S1.2@-531.89,-1066.98 S1.2@-496.46,-1066.98 ; S1.2@-501.87,-1096.36 S1.2@-537.31,-1096.36 S1.2@-560.38,-1073.29 ; -2768.31,-933.44 cw(c-2810.56,-933.44) -2780.68,-963.32 ccw(c-2810.56,-933.44) -2768.31,-933.44 ; -2768.31,-933.44 ccw(c-2726.06,-933.44) -2755.93,-963.32 cw(c-2726.06,-933.44) -2768.31,-933.44 ; -2669.15,-900.69 cw(c-2669.15,-934.86) -2644.98,-910.7 ccw(c-2669.15,-934.86) -2669.15,-900.69 ; -2669.15,-900.69 ccw(c-2669.15,-866.52) -2644.98,-890.68 cw(c-2669.15,-866.52) -2669.15,-900.69 ; -2563.21,-1722.34 cw(c-2587.88,-1722.34) -2570.44,-1739.78 ccw(c-2587.88,-1722.34) -2563.21,-1722.34 ; -2563.21,-1722.34 ccw(c-2538.55,-1722.34) -2555.99,-1739.78 cw(c-2538.55,-1722.34) -2563.21,-1722.34 ; -2541,-1840.39 cw(c-2559.11,-1840.39) -2546.3,-1853.2 ccw(c-2559.11,-1840.39) -2541,-1840.39 ; -2541,-1840.39 ccw(c-2522.89,-1840.39) -2535.7,-1853.2 cw(c-2522.89,-1840.39) -2541,-1840.39 ; -2457.21,-735.59 ccw(c-2420.29,-772.52) -2472.5,-772.88 cw(c-2420.29,-772.52) -2457.21,-735.59 ; -2457.21,-735.59 ccw(c-2468.51,-724.29) -2454.08,-717.42 cw(c-2468.51,-724.29) -2457.21,-735.59 ; -2289,-925.61 cw(c-2270.89,-925.61) -2283.7,-912.8 ccw(c-2270.89,-925.61) -2289,-925.61 ; -2289,-925.61 ccw(c-2307.11,-925.61) -2294.3,-912.8 cw(c-2307.11,-925.61) -2289,-925.61 ; -2289,-884.39 cw(c-2307.11,-884.39) -2294.3,-897.2 ccw(c-2307.11,-884.39) -2289,-884.39 ; -2289,-884.39 ccw(c-2270.89,-884.39) -2283.7,-897.2 cw(c-2270.89,-884.39) -2289,-884.39 ; -2289,-872.61 cw(c-2270.89,-872.61) -2283.7,-859.8 ccw(c-2270.89,-872.61) -2289,-872.61 ; -2289,-872.61 ccw(c-2307.11,-872.61) -2294.3,-859.8 cw(c-2307.11,-872.61) -2289,-872.61 ; -2279.11,-1809 cw(c-2279.11,-1827.11) -2266.3,-1814.3 ccw(c-2279.11,-1827.11) -2279.11,-1809 ; -2279.11,-1809 ccw(c-2279.11,-1790.89) -2266.3,-1803.7 cw(c-2279.11,-1790.89) -2279.11,-1809 ; -2123,-760.39 cw(c-2141.11,-760.39) -2128.3,-773.2 ccw(c-2141.11,-760.39) -2123,-760.39 ; -2123,-760.39 ccw(c-2104.89,-760.39) -2117.7,-773.2 cw(c-2104.89,-760.39) -2123,-760.39 ; -1512,-1833.39 cw(c-1530.11,-1833.39) -1517.3,-1846.2 ccw(c-1530.11,-1833.39) -1512,-1833.39 ; -1512,-1833.39 ccw(c-1493.89,-1833.39) -1506.7,-1846.2 cw(c-1493.89,-1833.39) -1512,-1833.39 ; -1512,-1821.61 cw(c-1493.89,-1821.61) -1506.7,-1808.8 ccw(c-1493.89,-1821.61) -1512,-1821.61 ; -1512,-1821.61 ccw(c-1530.11,-1821.61) -1517.3,-1808.8 cw(c-1530.11,-1821.61) -1512,-1821.61 ; -1447.46,-799.27 cw(c-1472.13,-799.27) -1454.69,-816.71 ccw(c-1472.13,-799.27) -1447.46,-799.27 ; -1447.46,-799.27 ccw(c-1422.8,-799.27) -1440.24,-816.71 cw(c-1422.8,-799.27) -1447.46,-799.27 ; -1439.9,-1598.51 cw(c-1439.9,-1569.09) -1460.7,-1589.9 ccw(c-1439.9,-1569.09) -1439.9,-1598.51 ; -1439.9,-1598.51 ccw(c-1439.9,-1627.93) -1460.7,-1607.13 cw(c-1439.9,-1627.93) -1439.9,-1598.51 ; -1405.99,-591.45 cw(c-1423.56,-596.16) -1410.02,-608.31 ccw(c-1423.56,-596.16) -1405.99,-591.45 ; -1405.99,-591.45 ccw(c-1390.84,-587.39) -1393.75,-602.8 cw(c-1390.84,-587.39) -1405.99,-591.45 ; -1374.1,-1454.8 cw(c-1390.15,-1454.8) -1379.55,-1466.85 ccw(c-1390.15,-1454.8) -1374.1,-1454.8 ; -1374.1,-1454.8 ccw(c-1358.05,-1454.8) -1368.65,-1466.85 cw(c-1358.05,-1454.8) -1374.1,-1454.8 ; -1084.89,-1415 cw(c-1084.89,-1396.89) -1097.7,-1409.7 ccw(c-1084.89,-1396.89) -1084.89,-1415 ; -1084.89,-1415 ccw(c-1084.89,-1433.11) -1097.7,-1420.3 cw(c-1084.89,-1433.11) -1084.89,-1415 ; -947.46,-799.27 cw(c-972.13,-799.27) -954.69,-816.71 ccw(c-972.13,-799.27) -947.46,-799.27 ; -947.46,-799.27 ccw(c-922.8,-799.27) -940.24,-816.71 cw(c-922.8,-799.27) -947.46,-799.27 ; -846.38,-1501 cw(c-846.38,-1481.08) -860.47,-1495.17 ccw(c-846.38,-1481.08) -846.38,-1501 ; -846.38,-1501 ccw(c-846.38,-1520.92) -860.47,-1506.83 cw(c-846.38,-1520.92) -846.38,-1501 ; -842.92,-1501 cw(c-842.92,-1520.92) -828.83,-1506.83 ccw(c-842.92,-1520.92) -842.92,-1501 ; -842.92,-1501 ccw(c-842.92,-1481.08) -828.83,-1495.17 cw(c-842.92,-1481.08) -842.92,-1501 ; -823,-1802.29 cw(c-844.91,-1802.29) -833.32,-1820.88 ccw(c-844.91,-1802.29) -823,-1802.29 ; -823,-1548.47 cw(c-803.08,-1548.47) -817.17,-1534.39 ccw(c-803.08,-1548.47) -823,-1548.47 ; -823,-1548.47 ccw(c-842.92,-1548.47) -828.83,-1534.39 cw(c-842.92,-1548.47) -823,-1548.47 ; -818.9,-1768.04 ccw(c-840.09,-1747.27) v1@-811.42,-1739.64 ; -818.9,-1768.04 ccw(c-840.09,-1747.27) v1@-811.42,-1739.64 ; -818.9,-1768.04 ccw(c-840.09,-1747.27) v1@-811.42,-1739.64 ; -727.11,-1742 cw(c-727.11,-1760.11) -714.3,-1747.3 ccw(c-727.11,-1760.11) -727.11,-1742 ; -727.11,-1742 ccw(c-727.11,-1723.89) -714.3,-1736.7 cw(c-727.11,-1723.89) -727.11,-1742 ; -709,-1776.39 cw(c-727.11,-1776.39) -714.3,-1789.2 ccw(c-727.11,-1776.39) -709,-1776.39 ; -709,-1776.39 ccw(c-690.89,-1776.39) -703.7,-1789.2 cw(c-690.89,-1776.39) -709,-1776.39 ; -709,-1762.61 cw(c-690.89,-1762.61) -703.7,-1749.8 ccw(c-690.89,-1762.61) -709,-1762.61 ; -709,-1762.61 ccw(c-727.11,-1762.61) -714.3,-1749.8 cw(c-727.11,-1762.61) -709,-1762.61 ; -696,-1640.21 cw(c-715.91,-1640.21) -701.83,-1654.29 ccw(c-715.91,-1640.21) -696,-1640.21 ; -696,-1640.21 ccw(c-676.09,-1640.21) -690.17,-1654.29 cw(c-676.09,-1640.21) -696,-1640.21 ; v1(-683.64,-1044) -631.09,-1044 cw(c-631.09,-1144) S1.2@-560.38,-1073.29 ; -677,-898.39 cw(c-695.11,-898.39) -682.3,-911.2 ccw(c-695.11,-898.39) -677,-898.39 ; -677,-898.39 ccw(c-658.89,-898.39) -671.7,-911.2 cw(c-658.89,-898.39) -677,-898.39 ; -658.89,-919 cw(c-658.89,-900.89) -671.7,-913.7 ccw(c-658.89,-900.89) -658.89,-919 ; -658.89,-919 ccw(c-658.89,-937.11) -671.7,-924.3 cw(c-658.89,-937.11) -658.89,-919 ; -584.11,-916.38 cw(c-577.86,-927.2) -569.41,-918 ccw(c-577.86,-927.2) -584.11,-916.38 ; -584.11,-916.38 ccw(c-589.7,-906.69) -579.1,-903.11 cw(c-589.7,-906.69) -584.11,-916.38 ; -583.12,-915.82 cw(c-558.99,-957.6) -546.46,-911.01 ccw(c-558.99,-957.6) -583.12,-915.82 ; -583.12,-915.82 ccw(c-607.25,-874.03) -560.63,-886.47 cw(c-607.25,-874.03) -583.12,-915.82 ; S1.2@-560.38,-1073.29 cw(c-572.05,-1084.96) -556.37,-1090.11 ccw(c-572.05,-1084.96) S1.2@-560.38,-1073.29 ; S1.2@-560.38,-1073.29 ccw(c-548.71,-1061.62) -543.56,-1077.3 cw(c-548.71,-1061.62) S1.2@-560.38,-1073.29 ; S1.2@-557.56,-1074.93 ccw(c-547.54,-1057.7) S1.2@-542.44,-1076.97 ; S1.2@-557.56,-1074.93 ccw(c-547.54,-1057.7) S1.2@-542.44,-1076.97 ; S1.2@-557.56,-1074.93 ccw(c-547.54,-1057.7) S1.2@-542.44,-1076.97 ; S1.2@-557.56,-1074.93 ccw(c-547.54,-1057.7) S1.2@-542.44,-1076.97 ; S1.2@-501.87,-1096.36 cw(c-501.88,-1075.1) -520.11,-1086.04 ccw(c-501.88,-1075.1) S1.2@-501.87,-1096.36 ; S1.2@-501.87,-1096.36 ccw(c-501.88,-1117.63) -520.11,-1106.68 cw(c-501.88,-1117.63) S1.2@-501.87,-1096.36 ; S1.2@-501.87,-891.64 cw(c-501.88,-863.04) -525.02,-879.85 ccw(c-501.88,-863.04) S1.2@-501.87,-891.64 ; S1.2@-501.87,-891.64 ccw(c-501.88,-920.24) -525.02,-903.43 cw(c-501.88,-920.24) S1.2@-501.87,-891.64 ; C2.2@-2768.31,-1003.19 cw(c-2768.31,-1091.31) -2706,-1029 ccw(c-2768.31,-1091.31) C2.2@-2768.31,-1003.19 ; C2.2@-2768.31,-988.19 cw(c-2768.31,-1040.1) -2731.6,-1003.4 ccw(c-2768.31,-1040.1) C2.2@-2768.31,-988.19 ; D1.2@-2763.1,-1561.7 ccw(c-2814.55,-1510.25) -2741.8,-1510.25 cw(c-2814.55,-1510.25) D1.2@-2763.1,-1561.7 ; D3.2@-2759.1,-806.56 cw(c-2782.76,-830.21) -2749.31,-830.21 ccw(c-2782.76,-830.21) D3.2@-2759.1,-806.56 ; D1.2@-2752.5,-1572.31 ccw(c-2778.34,-1546.47) -2741.8,-1546.47 cw(c-2778.34,-1546.47) D1.2@-2752.5,-1572.31 ; -2749.31,-824.51 cw(c-2723.92,-824.51) -2741.87,-806.56 ccw(c-2723.92,-824.51) -2749.31,-824.51 ; -2722.38,-1012.62 cw(c-2739.45,-1029.69) -2715.31,-1029.69 ccw(c-2739.45,-1029.69) -2722.38,-1012.62 ; U1.1@-2593.64,-886.54 ccw(c-2593.64,-862.16) -2576.4,-879.4 cw(c-2593.64,-862.16) U1.1@-2593.64,-886.54 ; U1.1@-2579.48,-900.69 cw(c-2535.52,-900.69) -2566.61,-869.61 ccw(c-2535.52,-900.69) U1.1@-2579.48,-900.69 ; U8.3@-2564.87,-1756.87 cw(c-2570.5,-1777.88) -2551.66,-1767 ccw(c-2570.5,-1777.88) U8.3@-2564.87,-1756.87 ; -2554.44,-1674.55 cw(c-2532.5,-1687.21) -2539.06,-1662.74 ccw(c-2532.5,-1687.21) -2554.44,-1674.55 ; U8.3@-2552.36,-1749.64 ccw(c-2525.72,-1756.78) -2549.61,-1770.57 cw(c-2525.72,-1756.78) U8.3@-2552.36,-1749.64 ; C4.2@-2490,-755.5 ccw(c-2490,-724.39) -2468,-746.39 cw(c-2490,-724.39) C4.2@-2490,-755.5 ; -2468.24,-746.63 ccw(c-2500.68,-714.19) -2454.81,-714.19 cw(c-2500.68,-714.19) -2468.24,-746.63 ; C12.2@-2138.37,-726.37 cw(c-2175.49,-763.49) -2123,-763.49 ccw(c-2175.49,-763.49) C12.2@-2138.37,-726.37 ; -2123,-749.01 cw(c-2090.99,-749.01) -2113.63,-726.37 ccw(c-2090.99,-749.01) -2123,-749.01 ; -1364.67,-1430.89 cw(c-1353.4,-1437.4) -1356.77,-1424.83 ccw(c-1353.4,-1437.4) -1364.67,-1430.89 ; -920.91,-737.84 ccw(c-930.38,-726.25) -915.49,-727.75 cw(c-930.38,-726.25) -920.91,-737.84 ; v1@-911.82,-725.8 ccw(c-903.92,-711.1) -899.11,-727.08 cw(c-903.92,-711.1) v1@-911.82,-725.8 ; -909.6,-1892.97 cw(c-881.03,-1892.97) -901.23,-1872.77 ccw(c-881.03,-1892.97) -909.6,-1892.97 ; -909.6,-1859.38 cw(c-877.62,-1859.38) -900.23,-1836.77 ccw(c-877.62,-1859.38) -909.6,-1859.38 ; -909.6,-1849.03 ccw(c-881.03,-1849.03) -901.23,-1869.23 cw(c-881.03,-1849.03) -909.6,-1849.03 ; -909.6,-1811.21 cw(c-870.79,-1811.21) -898.23,-1783.77 ccw(c-870.79,-1811.21) -909.6,-1811.21 ; -909.6,-1810.62 ccw(c-877.62,-1810.62) -900.23,-1833.23 cw(c-877.62,-1810.62) -909.6,-1810.62 ; -902.33,-1748.88 ccw(c-861.65,-1759.39) -897.85,-1780.73 cw(c-861.65,-1759.39) -902.33,-1748.88 ; -898.95,-1740.6 cw(c-875.54,-1748.02) -886.85,-1726.22 ccw(c-875.54,-1748.02) -898.95,-1740.6 ; v1@-885.53,-1723.63 cw(c-864.6,-1720.52) -880.99,-1707.14 ccw(c-864.6,-1720.52) v1@-885.53,-1723.63 ; M1.11@-837.6,-826.58 cw(c-800.96,-836.4) -819.92,-803.55 ccw(c-800.96,-836.4) M1.11@-837.6,-826.58 ; v1@-833.77,-1824.77 cw(c-859.76,-1850.76) -823,-1850.76 ccw(c-859.76,-1850.76) v1@-833.77,-1824.77 ; v1@-832.77,-1870.77 cw(c-856.35,-1894.35) -823,-1894.35 ccw(c-856.35,-1894.35) v1@-832.77,-1870.77 ; v1@-832.77,-1867.23 ccw(c-856.35,-1843.65) -823,-1843.65 cw(c-856.35,-1843.65) v1@-832.77,-1867.23 ; v1@-831.67,-1773.59 ccw(c-845.74,-1723.12) -800.1,-1748.86 cw(c-845.74,-1723.12) v1@-831.67,-1773.59 ; -809.6,-800.93 cw(c-806.41,-812.84) -800.25,-802.17 ccw(c-806.41,-812.84) -809.6,-800.93 ; Cr1.1@-681.3,-766.8 cw(c-691.69,-777.19) -677,-777.19 ccw(c-691.69,-777.19) Cr1.1@-681.3,-766.8 ; Cr1.1@-681.3,-751.2 ccw(c-698.93,-733.57) -674,-733.57 cw(c-698.93,-733.57) Cr1.1@-681.3,-751.2 ; -677,-782.02 cw(c-655.48,-782.02) -670.7,-766.8 ccw(c-655.48,-782.02) -677,-782.02 ; v1@-619.83,-1042.75 ccw(c-607.65,-1035.72) -611.29,-1049.31 cw(c-607.65,-1035.72) v1@-619.83,-1042.75 ; -611.4,-1043.83 cw(c-641.8,-1096.5) -580.99,-1096.41 ccw(c-641.8,-1096.5) -611.4,-1043.83 ; -592.39,-1054.67 cw(c-631.06,-1121.17) -556.7,-1101.49 ccw(c-631.06,-1121.17) -592.39,-1054.67 ; -588.86,-1056.85 cw(c-611.73,-1096.46) -565.99,-1096.39 ccw(c-611.73,-1096.46) -588.86,-1056.85 ; -587.97,-1057.36 ccw(c-565.88,-1019.11) -554.45,-1061.78 cw(c-565.88,-1019.11) -587.97,-1057.36 ; S1.2@-564.48,-1070.9 cw(c-573.2,-1085.88) -556.56,-1090.74 ccw(c-573.2,-1085.88) S1.2@-564.48,-1070.9 ; S1.2@-561.09,-1072.88 cw(c-581.55,-1108.07) -542.2,-1097.66 ccw(c-581.55,-1108.07) S1.2@-561.09,-1072.88
  Top Layer w20: v1(-2505,-1426) -2504,-1427 cw(c-2546.43,-1469.43) -2486.43,-1469.43 C8.2@-2486.43,-1470.69 -2486.31,-1470.81 C7.2@-2486.31,-1524.69
  Top Layer w30: J1.9@-2744.77,-1451.5 ccw(c-2754.29,-1402.5) -2711.06,-1427.46 ; J1.8@-2744.77,-1186.86 cw(c-2754.29,-1235.86) -2711.06,-1210.9 ; J1.7@-2651.02,-1414.65 -2667.87,-1414.65 ccw(c-2667.87,-1514.65) -2738.58,-1443.94 J1.9@-2756.54,-1461.9 J1.8@-2756.54,-1176.46 -2738.58,-1194.42 ccw(c-2667.87,-1123.71) -2667.87,-1223.71 J1.6@-2651.02,-1223.71 ; J1.9@-2732.53,-1464.64 cw(c-2663.43,-1483.15) -2699.2,-1421.21 ccw(c-2663.43,-1483.15) J1.9@-2732.53,-1464.64 ; J1.8@-2732.53,-1173.72 ccw(c-2663.43,-1155.21) -2699.2,-1217.16 cw(c-2663.43,-1155.21) J1.8@-2732.53,-1173.72 ; -2682.43,-1418.55 cw(c-2673.19,-1453.04) -2655.33,-1422.12 ccw(c-2673.19,-1453.04) -2682.43,-1418.55 ; -2682.43,-1219.81 ccw(c-2673.19,-1185.32) -2655.33,-1216.24 cw(c-2673.19,-1185.32) -2682.43,-1219.81
  Bottom Layer w15: v1(-1447,-770.59) v1@-1447,-770 ; v1(-1357.41,-1422.41) ccw(c-1360.83,-1419) v1@-1356,-1419 ; v1(-866.3,-1425.3) v1@-866,-1425 ; v1@-697,-1620 cw(c-699.41,-1622.41) v1(-696,-1622.41)
  other v1: -2783,-1980 -2603,-1980 -2423,-1980 -1433,-1980 -1073,-1980 -623,-1980 -2378,-1890 -2288,-1890 -2198,-1890 -2108,-1890 -2018,-1890 -1748,-1890 -1658,-1890 -1568,-1890 -1388,-1890 -1208,-1890 -1118,-1890 -1028,-1890 -938,-1890 -758,-1890 -903,-1871 -831,-1869 -902,-1835 -832,-1823 -2783,-1800 -2693,-1800 -2603,-1800 -2513,-1800 -2063,-1800 -1703,-1800 -1613,-1800 -1253,-1800 -1163,-1800 -1073,-1800 -983,-1800 -803,-1800 -758,-1794 -900,-1782 -831,-1776 -809,-1739 -888,-1724 -765,-1722 -2738,-1710 -2648,-1710 -2018,-1710 -1568,-1710 -1388,-1710 -1298,-1710 -1208,-1710 -1118,-1710 -1028,-1710 -938,-1710 -856,-1682 -786,-1657 -2333,-1620 -2243,-1620 -2153,-1620 -1253,-1620 -1163,-1620 -1073,-1620 -983,-1620 -893,-1620 -803,-1620 -2288,-1530 -2198,-1530 -2108,-1530 -2018,-1530 -1928,-1530 -758,-1530 -668,-1530 -2693,-1440 -2603,-1440 -2333,-1440 -2243,-1440 -2153,-1440 -2063,-1440 -1973,-1440 -713,-1440 -623,-1440 -533,-1440 -2738,-1350 -2198,-1350 -2108,-1350 -2018,-1350 -1928,-1350 -938,-1350 -848,-1350 -758,-1350 -668,-1350 -578,-1350 -488,-1350 -2783,-1260 -2693,-1260 -2243,-1260 -2153,-1260 -1973,-1260 -1703,-1260 -983,-1260 -893,-1260 -803,-1260 -713,-1260 -623,-1260 -533,-1260 -2648,-1170 -1838,-1170 -1748,-1170 -938,-1170 -848,-1170 -758,-1170 -668,-1170 -578,-1170 -488,-1170 -2513,-1080 -1883,-1080 -1703,-1080 -983,-1080 -893,-1080 -803,-1080 -713,-1080 -623,-1080 -622,-1044 -735,-1027 -938,-990 -848,-990 -766,-988 -650,-957 -610,-957 -775,-933 -631,-919 -2783,-900 -2693,-900 -2513,-900 -2333,-900 -775,-882 -677,-846 -775,-832 -578,-810 -488,-810 -677,-807 -799,-800 -946,-774 -913,-728 -2783,-720 -2693,-720 -2603,-720 -2513,-720 -713,-720 -623,-720 -533,-720 -805,-717 -762,-717 -2558,-630 -758,-630 -668,-630
  other v2: -2429.31,-1338.31 -2386,-1338.31 -2342.69,-1338.31 -2429.31,-1295 -2342.69,-1295 -2429.31,-1251.69 -2386,-1251.69 -2342.69,-1251.69
HALL_IN1: M1.7 P2.11 | length 916.7
  Top Layer w15: P2.11@-1668,-1218 -1587.29,-1137.29 cw(c-1516.58,-1208) -1516.58,-1108 -1223.53,-1108 cw(c-1223.53,-1186.53) -1168,-1131 cw(c-1217.58,-1180.58) -1147.46,-1180.58 M1.7@-1147.46,-1333.78 ; P2.11@-1668,-1195.97 ccw(c-1668,-1142.79) -1630.4,-1180.4 ccw(c-1592.79,-1218) P2.11@-1645.97,-1218 ; -1147.46,-1287.46 cw(c-1172.13,-1287.46) -1154.69,-1304.9 ccw(c-1172.13,-1287.46) -1147.46,-1287.46 ; -1147.46,-1287.46 ccw(c-1122.8,-1287.46) -1140.24,-1304.9 cw(c-1122.8,-1287.46) -1147.46,-1287.46
HALL_IN2: C18.2 P2.12 R13.2 U8.2 | length 1554.8
  Top Layer w10: R13.2@-2399,-1723 -2196.42,-1723 ccw(c-2196.42,-1623) -2125.71,-1693.71 -2050.29,-1618.29 cw(c-1979.58,-1689) -1979.58,-1589 -1902.38,-1589 ccw(c-1902.38,-1544.62) -1871,-1576 ccw(c-1904.8,-1542.2) -1857,-1542.2 -1857,-1348.42 cw(c-1757,-1348.42) -1827.71,-1277.71 P2.12@-1768,-1218 ; P2.12@-1792.53,-1218 cw(c-1851.74,-1218) -1809.87,-1259.87 cw(c-1768,-1301.74) P2.12@-1768,-1242.53 ; P2.12@-1782.53,-1218 cw(c-1817.6,-1218) -1792.8,-1242.8 cw(c-1768,-1267.6) P2.12@-1768,-1232.53 ; -2372.36,-1723 cw(c-2372.36,-1698.86) -2389.43,-1715.93 ccw(c-2372.36,-1698.86) -2372.36,-1723 ; -2372.36,-1723 ccw(c-2372.36,-1747.14) -2389.43,-1730.07 cw(c-2372.36,-1747.14) -2372.36,-1723
  Top Layer w15: C18.2@-2487,-1653 -2487,-1655.97 ccw(c-2411.16,-1655.97) U8.2@-2464.79,-1709.6 ccw(c-2432.43,-1677.24) -2432.43,-1723 R13.2@-2399,-1723 ; U8.2@-2461.05,-1719.44 cw(c-2455.09,-1740.74) -2444.03,-1721.58 cw(c-2433.99,-1704.19) U8.2@-2453.75,-1707.77 ; -2419.61,-1723 cw(c-2419.61,-1741.11) -2406.8,-1728.3 ccw(c-2419.61,-1741.11) -2419.61,-1723 ; -2419.61,-1723 ccw(c-2419.61,-1704.89) -2406.8,-1717.7 cw(c-2419.61,-1704.89) -2419.61,-1723 ; C18.2@-2489.75,-1662 cw(c-2496.95,-1674.46) -2483.04,-1670.73 ccw(c-2496.95,-1674.46) C18.2@-2489.75,-1662 ; -2481.68,-1675.81 cw(c-2460.61,-1670.16) -2479.5,-1659.25 ccw(c-2460.61,-1670.16) -2481.68,-1675.81 ; -2478.4,-1686.03 cw(c-2502.28,-1699.82) -2475.64,-1706.95 ccw(c-2502.28,-1699.82) -2478.4,-1686.03 ; -2476.34,-1689.59 ccw(c-2457.5,-1678.72) -2463.13,-1699.73 cw(c-2457.5,-1678.72) -2476.34,-1689.59
I2C1_SCL1: M1.14 P2.17 | length 996.5
  Top Layer w15: P2.17@-1668,-918 -1660.42,-918 cw(c-1660.42,-1018) -1589.71,-947.29 -1549.29,-987.71 ccw(c-1478.58,-917) -1478.58,-1017 -1086.6,-1017 ccw(c-1086.6,-921.4) -1019,-989 ccw(c-1070.99,-937.01) -997.46,-937.01 M1.14@-997.46,-845.59 ; P2.17@-1656.45,-936.76 cw(c-1627.84,-983.25) -1613.71,-930.52 ; P2.17@-1648.92,-906.99 ccw(c-1608.67,-883.75) -1620.7,-928.64 ; -997.46,-891.91 cw(c-972.8,-891.91) -990.24,-874.47 ccw(c-972.8,-891.91) -997.46,-891.91 ; -997.46,-891.91 ccw(c-1022.13,-891.91) -1004.69,-874.47 cw(c-1022.13,-891.91) -997.46,-891.91
I2C1_SCL2: P2.18 R6.1 U4.6 U5.1 | length 1230.5
  Top Layer w10: R6.1@-2241.58,-1007.77 ccw(c-2246.78,-988.37) R6.1@-2227.5,-994 ; R6.1@-2228.41,-995.41 cw(c-2225,-998.83) R6.1@-2225,-994 ; v1(-2228,-956) -2228,-986.76 ccw(c-2217.76,-986.76) R6.1@-2225,-994 ; R6.1@-2222.5,-984 ccw(c-2222.5,-965.89) -2209.7,-978.7 ; -2217.1,-1233 U4.6@-2199.24,-1233 ; R6.1@-2212.5,-994 cw(c-2182.32,-994) -2203.66,-972.66 ; U4.6@-2197,-1232 -2219.86,-1232 cw(c-2219.86,-1197.86) -2225.23,-1231.57 cw(c-2219.86,-1197.86) -2244,-1222 cw(c-2193.3,-1171.3) -2265,-1171.3 -2265,-1042 cw(c-2233.61,-1042) -2255.81,-1019.81 -2233.54,-997.54 cw(c-2225,-1006.07) R6.1@-2225,-994 ; U5.1@-2172.13,-911.45 cw(c-2243.78,-911.45) -2193.11,-962.11 R6.1@-2225,-994 ; -2228,-968.07 cw(c-2215.93,-968.07) -2224.46,-959.54 ccw(c-2215.93,-968.07) -2228,-968.07 ; -2228,-968.07 ccw(c-2240.07,-968.07) -2231.54,-959.54 cw(c-2240.07,-968.07) -2228,-968.07 ; -2248.84,-1012.84 cw(c-2227.5,-1034.18) -2227.5,-1004 ccw(c-2227.5,-1034.18) -2248.84,-1012.84 ; -2242.8,-1006.8 ccw(c-2255.61,-994) -2237.5,-994 cw(c-2255.61,-994) -2242.8,-1006.8 ; R6.1@-2234.57,-986.93 ccw(c-2250.43,-971.07) -2228,-971.07 cw(c-2250.43,-971.07) R6.1@-2234.57,-986.93 ; -2228,-968.65 ccw(c-2202.15,-968.65) -2220.43,-986.93 cw(c-2202.15,-968.65) -2228,-968.65 ; -2216.46,-1232 cw(c-2216.46,-1242.35) -2209.14,-1235.03 ccw(c-2216.46,-1242.35) -2216.46,-1232
  Bottom Layer w10: v1(-2228,-956) ccw(c-2182.13,-910.13) -2182.13,-975 -1866.42,-975 ccw(c-1866.42,-875) -1795.71,-945.71 P2.18@-1768,-918 ; v1@-2226.71,-960.83 cw(c-2223.58,-972.49) -2217.55,-962.04 cw(c-2211.51,-951.58) v1@-2223.17,-954.71
I2C1_SDA1: M1.15 P2.19 | length 970.4
  Top Layer w15: P2.19@-1668,-818 -1627.11,-818 ; P2.19@-1649.6,-830.12 cw(c-1627.11,-844.93) -1627.11,-818 ; P2.19@-1649.6,-805.88 ccw(c-1627.11,-791.07) -1627.11,-818 ; M1.15@-1047.46,-845.59 -1047.46,-930.91 cw(c-1097.09,-930.91) -1062,-966 cw(c-1112.7,-915.3) -1112.7,-987 -1472.05,-987 cw(c-1472.05,-902.63) -1531.71,-962.29 cw(c-1461,-891.58) -1561,-891.58 -1561,-871.38 ccw(c-1605.38,-871.38) -1574,-840 ccw(c-1627.11,-893.11) -1627.11,-818 ; -1047.46,-891.91 cw(c-1022.8,-891.91) -1040.24,-874.47 ccw(c-1022.8,-891.91) -1047.46,-891.91 ; -1047.46,-891.91 ccw(c-1072.13,-891.91) -1054.69,-874.47 cw(c-1072.13,-891.91) -1047.46,-891.91
I2C1_SDA2: P2.20 R7.1 U4.1 U5.4 | length 1177.3
  Top Layer w10: U5.4@-2113.07,-911.45 ccw(c-2029.83,-911.45) -2088.69,-970.31 R7.1@-2065,-994 ; U4.1@-2089,-1233 -2055.49,-1233 ccw(c-2055.49,-1212.51) -2041,-1227 ccw(c-2072.38,-1195.62) -2028,-1195.62 -2028,-1040.97 ccw(c-2068.97,-1040.97) -2040,-1012 ; -2086.34,-972.66 cw(c-2107.68,-994) R7.1@-2077.5,-994 ; -2080.3,-978.7 ccw(c-2067.5,-965.89) R7.1@-2067.5,-984 ; v1(-2062,-952) -2062,-986.76 cw(c-2072.24,-986.76) R7.1@-2065,-994 ; R7.1@-2065,-994 cw(c-2065,-1010.9) -2053.06,-998.94 -2040,-1012 ; -2062,-964.07 cw(c-2049.93,-964.07) -2058.46,-955.54 ccw(c-2049.93,-964.07) -2062,-964.07 ; -2062,-964.07 ccw(c-2074.07,-964.07) -2065.54,-955.54 cw(c-2074.07,-964.07) -2062,-964.07 ; -2040,-1012 ccw(c-2059.59,-1031.58) -2061.73,-1003.97 cw(c-2059.59,-1031.58) -2040,-1012 ; R7.1@-2069.57,-986.93 ccw(c-2087.85,-968.65) -2062,-968.65 cw(c-2087.85,-968.65) R7.1@-2069.57,-986.93 ; -2062,-971.07 ccw(c-2039.57,-971.07) -2055.43,-986.93 cw(c-2039.57,-971.07) -2062,-971.07 ; R7.1@-2052.5,-994 ccw(c-2039.22,-994) -2048.61,-1003.39 cw(c-2039.22,-994) R7.1@-2052.5,-994
  Bottom Layer w10: v1(-2062,-952) -1943.42,-952 ccw(c-1943.42,-852) -1872.71,-922.71 P2.20@-1768,-818 ; v1@-2058.46,-955.54 cw(c-2049.93,-964.07) -2049.93,-952 cw(c-2049.93,-939.93) v1@-2058.46,-948.46 ; P2.20@-1792.53,-818 cw(c-1851.74,-818) -1809.87,-859.87 cw(c-1768,-901.74) P2.20@-1768,-842.53 ; P2.20@-1782.53,-818 cw(c-1817.6,-818) -1792.8,-842.8 cw(c-1768,-867.6) P2.20@-1768,-832.53
NetC4_1: C4.1 C5.1 P1.1 U1.2 U1.4 | length 1332.3
  Top Layer w30: U1.2@-2614.31,-991.24 U1.4@-2370.21,-991.24 ; C4.1@-2405,-773 C4.1@-2404.81,-773.19 ; P1.1@-2397.31,-610.69 cw(c-2409.38,-622.76) -2392.31,-622.76 C5.1@-2392.31,-711.69 -2392.31,-742.31 ; U1.4@-2395.02,-966.44 U1.4@-2370.21,-991.24 ; C4.1@-2390.34,-775.59 ccw(c-2359.38,-783.88) -2387.14,-799.91 ; -2436.18,-991.24 cw(c-2436.18,-1057.21) -2389.53,-1010.56 ccw(c-2436.18,-1057.21) -2436.18,-991.24 ; -2436.18,-991.24 ccw(c-2436.18,-925.28) -2389.53,-971.92 cw(c-2436.18,-925.28) -2436.18,-991.24 ; C4.1@-2404.81,-773.19 ccw(c-2436.69,-742.31) -2392.31,-742.31 ; C4.1@-2404.81,-773.19 -2399.5,-778.5 cw(c-2470.21,-849.21) -2370.21,-849.21 U1.4@-2370.21,-991.24 ; -2392.31,-742.31 cw(c-2417.77,-742.31) -2405.01,-764.35 ccw(c-2417.77,-742.31) -2392.31,-742.31 ; -2370.21,-898.71 cw(c-2436.18,-898.71) -2389.53,-945.35 ccw(c-2436.18,-898.71) -2370.21,-898.71 ; -2370.21,-898.71 ccw(c-2304.25,-898.71) -2350.89,-945.35 cw(c-2304.25,-898.71) -2370.21,-898.71 ; P1.1@-2408.27,-630.27 cw(c-2446.82,-668.82) -2392.31,-668.82 ccw(c-2446.82,-668.82) P1.1@-2408.27,-630.27 ; C4.1@-2407.07,-765.93 ccw(c-2442.71,-730.29) -2392.31,-730.29 cw(c-2442.71,-730.29) C4.1@-2407.07,-765.93